# Altium PCB ADC_PCB.PcbDoc (part 2 of 2)
Units mil, origin at the board's own origin, x right, y up, seen from the top; angles counter-clockwise.
Board outline 5600 x 4000 mil, 4 copper layers (Top Layer, Plane(Gnd), Plane(Power), Bottom Layer), stack 23.756 mil thick; 244 components, 233 nets, 649 pads, 177 vias.
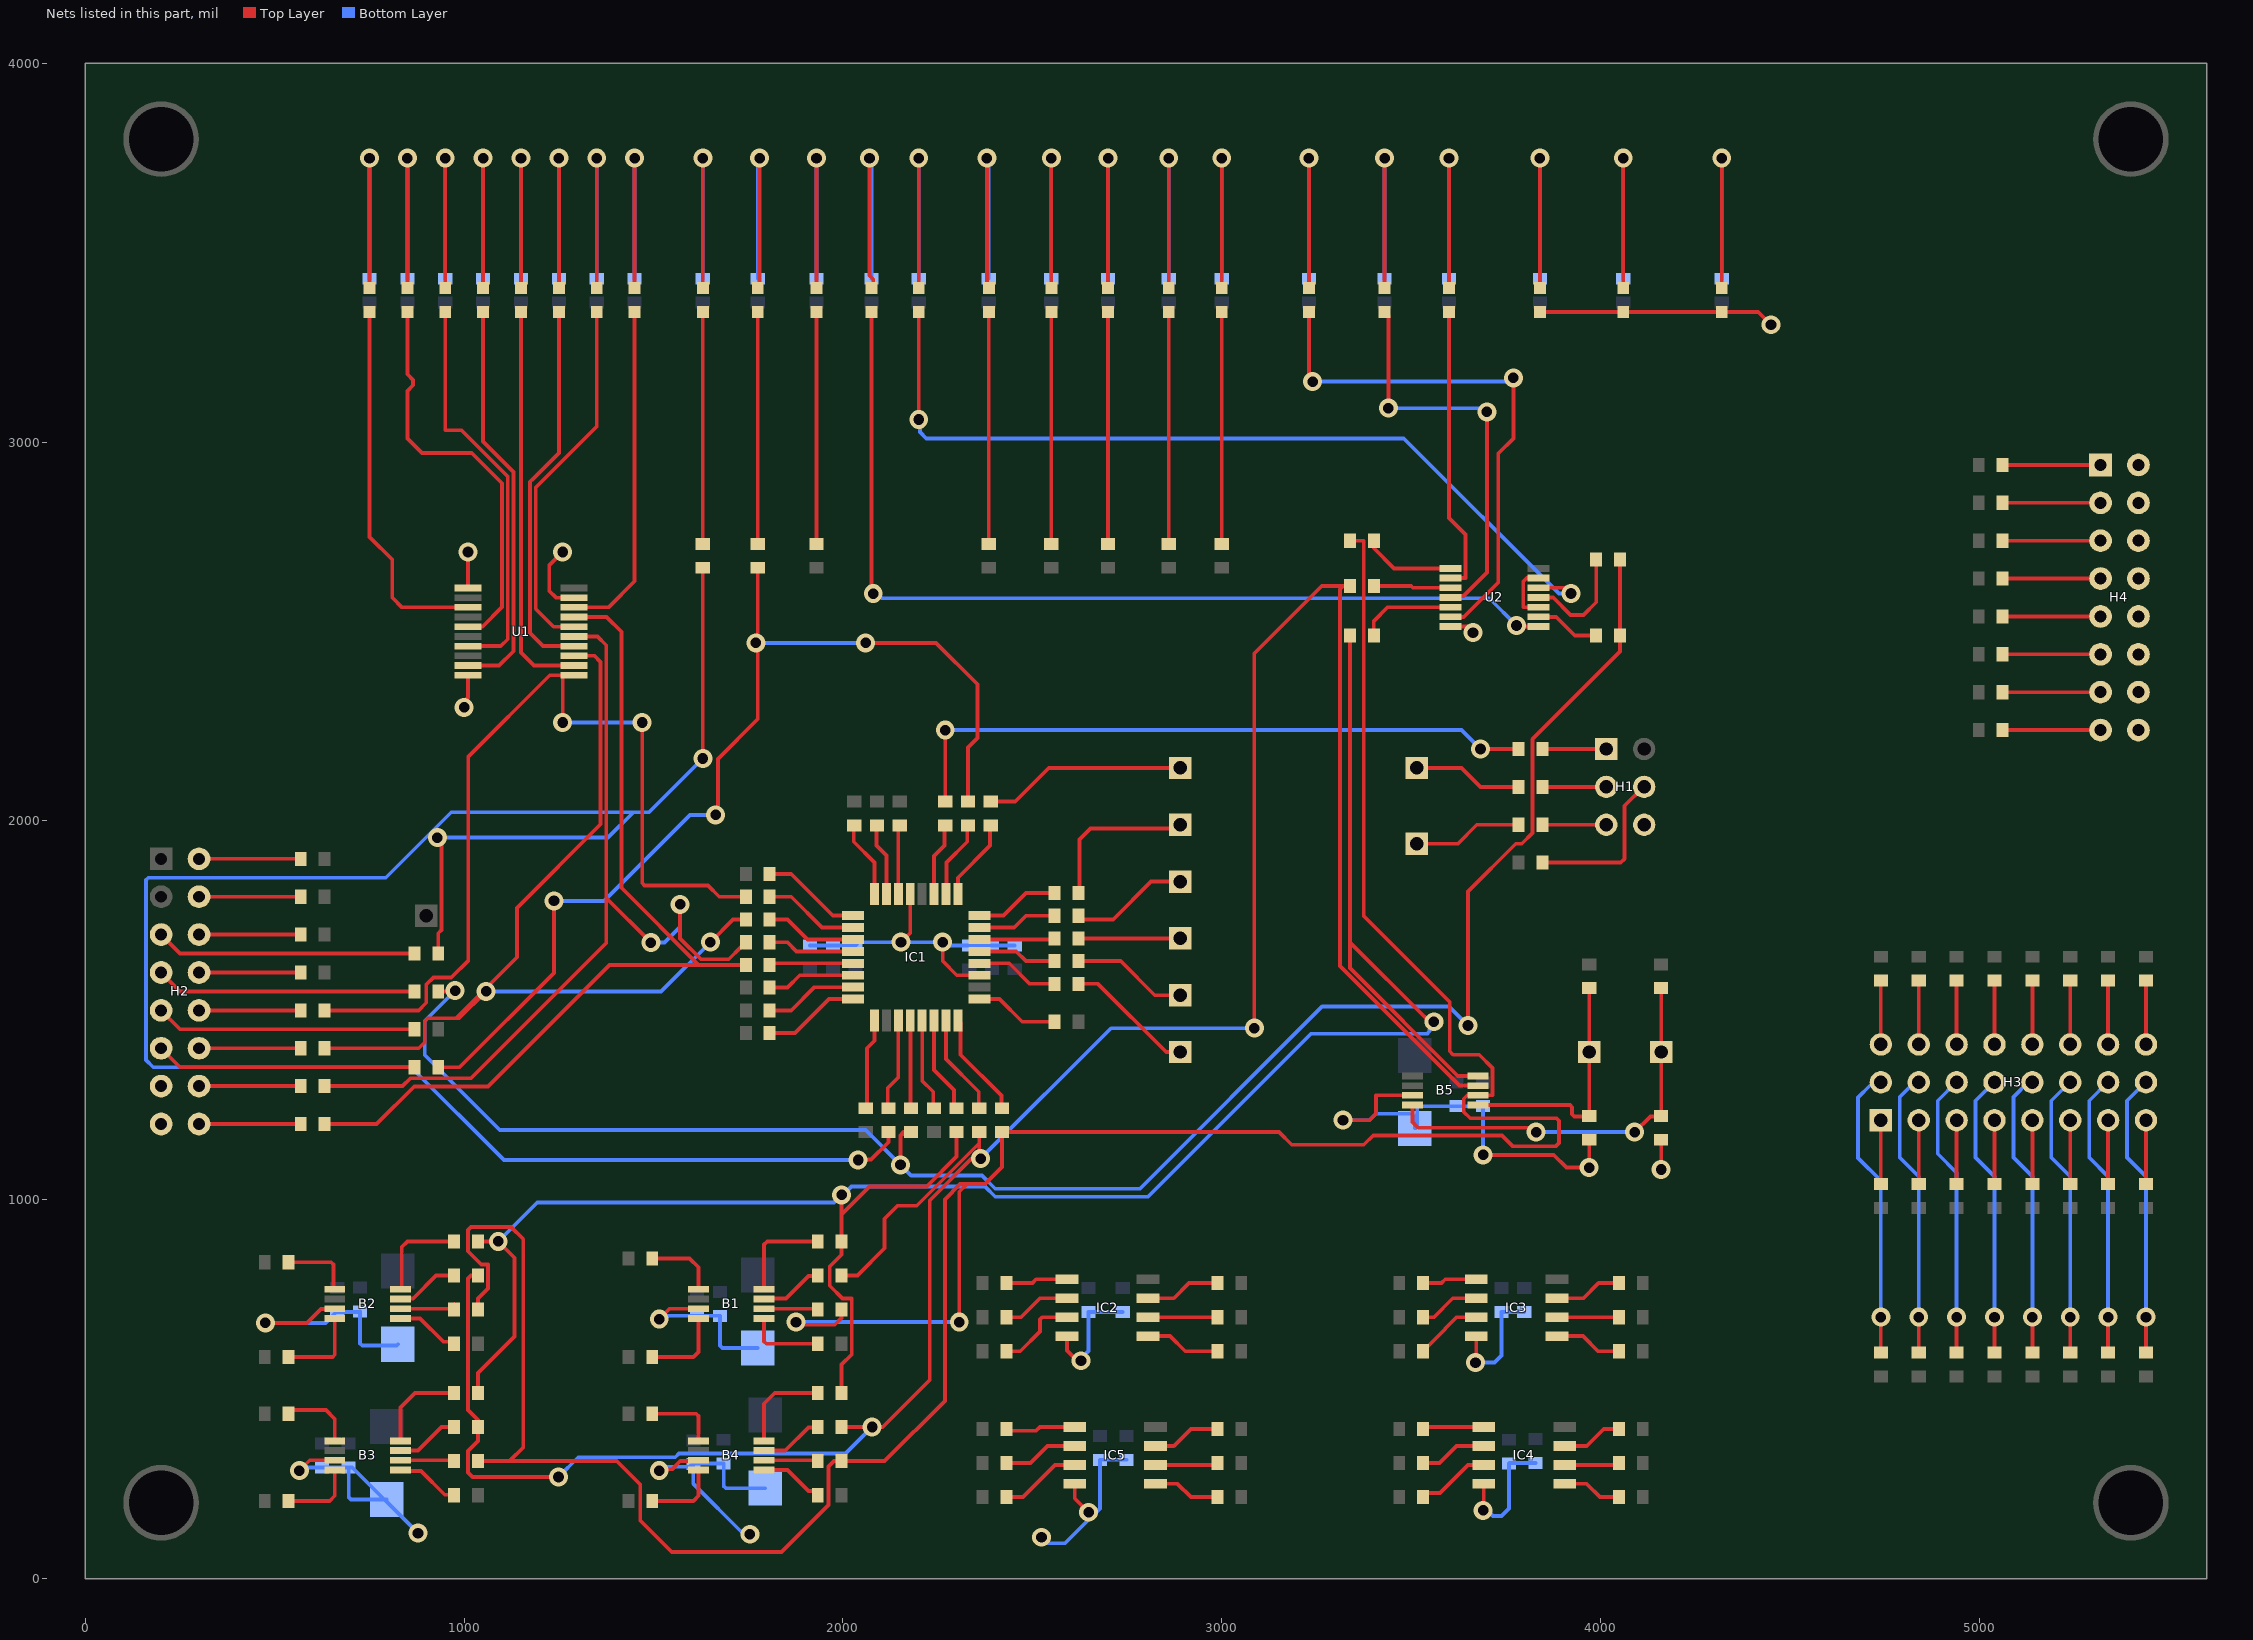
[diagram p4: the nets of this part, all layers, seen from the top]

## Via types
v1: diameter 50, hole 28, Top Layer to Bottom Layer, 177 vias

## Nets (pads, with @x,y where several pads share a name; then routed paths per layer and width w, separated by ;. In a path a pad name is that pad's centre, name@x,y a point inside that pad or via, vN(x,y) a via of type N, cw(c..) or ccw(c..) an arc to the next point about the centre after c; other vN are vias at no path point) (continued)
CPU_D4: R78.1 R84.1 U1.11 | length 2416.5
  Top Layer w10: R84.1@631.5,1500 880,1500 900,1520 900,1568 919.03,1587.03 966.03,1587.03 1011,1632 1011,2169.84 1226,2384.84 U1.11@1263,2384.84 ; v1(1260,2260) 1260,2381.84 U1.11@1263,2384.84 ; U1.11@1289.76,2384.84 U1.11@1263,2384.84 ; v1(1470,2260) 1470,1835.87 1475.87,1830 1643.52,1830 1673.52,1800 R78.1@1743.5,1800
  Bottom Layer w10: v1(1260,2260) v1(1470,2260)
CPU_D5: R82.1 R88.1 U1.13 | length 2461.3
  Top Layer w10: R88.1@631.5,1400 880,1400 896,1416 896,1471 904,1479 977.66,1479 ; v1(1058,1550) 987,1479 977.66,1479 ; U1.13@1289.76,2436.02 1344,2436.02 1360,2420.02 1360,1991.15 1139.11,1770.26 1139.11,1640.45 977.66,1479 ; v1(1650,1680) 1710,1740 R82.1@1743.5,1740
  Bottom Layer w10: v1(1058,1550) 1520,1550 v1(1650,1680)
CPU_D6: R86.1 R92.1 U1.15 | length 2408.4
  Top Layer w10: R92.1@631.5,1300 837,1300 858,1321 1018,1321 1375,1678 1375,1797 ; U1.15@1289.76,2487.2 1351.8,2487.2 1375,2464 1375,1797 ; v1(1493,1679) 1375,1797 ; v1(1570,1780) 1570,1690 1625,1635 1698.5,1635 1729.8,1666.3 1732.76,1666.3 1743.5,1677.05 R86.1@1743.5,1680
  Bottom Layer w10: v1(1493,1679) 1529,1679 1570,1720 v1(1570,1780)
CPU_D7: R90.1 R93.1 U1.17 | length 2391.2
  Top Layer w10: R93.1@631.5,1200 768.85,1200 868,1299.15 1063.15,1299.15 1384,1620 1620,1620 R90.1@1743.5,1620 ; U1.17@1289.76,2538.39 1376,2538.39 1415,2499.39 1415,1823.79 1618.79,1620
CPU_nInt: R60.1 R77.2 R104.2 | length 5556.7
  Top Layer w10: v1(929,1956) 940,1945 940,1712 931.5,1703.5 R77.2@931.5,1650 ; v1(1630,2165) R60.1@1630,2668.5 ; v1(2040,1105) 2041.14,1106.14 2074.14,1106.14 2120,1152 R104.2@2120,1178.5
  Bottom Layer w10: v1(929,1956) 1380,1956 1447,2023 ; v1(1630,2165) 1488,2023 1447,2023 ; v1(2040,1105) 1105,1105 860,1350 179,1350 160,1369 160,1844.14 165.86,1850 793,1850 966,2023 1447,2023
CPU_Reset: R61.1 R69.2 R89.2 | length 2768.4
  Top Layer w10: R89.2@931.5,1350 988,1350 1237,1599 v1(1237,1789) ; v1(1664,2016) 1670,2022 1670,2164 1775,2269 R61.1@1775,2668.5 ; v1(2060,2470) 2246,2470 2355.25,2360.75 2355.25,2218.91 2330,2193.66 R69.2@2330,2051.5
  Bottom Layer w10: v1(1237,1789) 1369,1789 1596,2016 v1(1664,2016) ; v1(1770,2470) v1(2060,2470)
CPU_RnW: R50.1 R51.1 R81.2 R103.2 | length 4913.3
  Top Layer w10: R81.2@931.5,1550 974,1550 v1(976,1552) ; v1(2152,1092) 2152,1170.5 ; v1(3650,1460) 3650,1814 3776,1940 3792,1940 3820,1968 3820,2216 4051.5,2447.5 R50.1@4051.5,2490 R51.1@4051.5,2690 ; 2152,1170.5 R103.2@2180,1178.5 2160,1178.5 2152,1170.5
  Bottom Layer w10: v1(976,1552) 896,1472 896,1382 1094,1184 2060,1184 v1(2152,1092) 2180,1064 2367.21,1064 2402.21,1029 2784.03,1029 3265.03,1510 3600,1510 v1(3650,1460)
DIN: B5.6 R3.1 R5.1 R15.1 R17.1 R47.1 R96.2 | length 8022
  Top Layer w10: R15.1@1036.5,310 1120,310 ; R5.1@1036.5,710 1036.5,739.5 1063,766 1063,829 1045,829 1010,864 1010,920 1018,928 1124,928 1156,896 1156,346 1120,310 ; v1(1876,677) 1883,670 1978.5,670 1996.5,688 R3.1@1996.5,710 ; v1(2307,677) 2307,1021 2327.3,1041.3 ; R47.1@3338.5,2740 3374,2740 3375,2739 3375,1749 3601.68,1522.32 3601.68,1392.22 3610.9,1383 3680,1383 3715,1348 3715,1275.71 B5.6@3676.61,1275.71 3648,1275.71 3639,1266.71 3639,1232 3656,1215 3883.79,1215 3890,1208.79 3890,1150 3881,1141 3769,1141 3740,1170 3400,1170 3375,1145 3185,1145 3151.5,1178.5 R96.2@2420,1178.5 2420,1086.3 2375,1041.3 2327.3,1041.3 ; 1120,310 1403,310 1465,248 1465,153 1548,70 1838,70 1962,194 1962,296 1976,310 R17.1@1996.5,310 2110,310 2269,469 2269,1001 2309.3,1041.3 2327.3,1041.3
  Bottom Layer w10: v1(1876,677) v1(2307,677)
DOUT: B5.7 R7.1 R9.1 R19.1 R21.1 R48.1 R98.2 | length 6932.8
  Top Layer w10: R9.1@1036.5,800 1018,800 1010,792 1010,445 1036.5,418.5 R19.1@1036.5,400 1036.5,363 1010,336.5 1010,280 1022,268 v1(1249,268) ; R21.1@1996.5,400 v1(2077,400) 2105,400 2229,524 2229,998 2339.5,1108.5 v1@2360,1112 ; R7.1@1996.5,800 2038,800 2110,872 2110,950 2144,984 2195,984 2360,1149 ; R98.2@2360,1178.5 2360,1149 ; v1(2363.5,1108.5) v1@2360,1112 ; v1(3086,1453) 3086,2442 3264,2620 3320,2620 ; R48.1@3338.5,2620 3320,2620 ; B5.7@3676.61,1301.3 3627.49,1301.3 3312,1616.79 3312,2612 3320,2620 ; v1@2360,1112 2360,1149
  Bottom Layer w10: v1(1249,268) 1301,320 1557,320 1567,330 2007,330 v1(2077,400) ; v1(2363.5,1108.5) 2708,1453 v1(3086,1453)
GND: B1.3 B2.3 B3.3 B4.3 B5.3 C1.2 C2.2 C3.2 C4.2 C5.2 C6.2 C7.2 C8.2 C9.2 C10.2 C11.2 C12.2 C13.2 C14.2 C15.2 C16.2 C17.2 C18.2 C19.2 C20.2 C21.2 C22.2 C23.2 C24.2 C25.2 C26.2 C27.2 C28.2 C29.2 H1.6 H2.13 H2.15 H4.2 H4.4 H4.6 H4.8 H4.10 H4.12 H4.14 H4.16 IC1.19 IC1.29 IC2.4 IC3.4 IC4.4 IC5.4 LED10.1 LED21.1 LED22.1 R155.1 R156.2 U1.1 U1.10 U1.19 U2.7 | length 7197.8
  Top Layer w10: v1(475,675) 585,675 621.68,711.68 657.87,711.68 B2.3@658.39,712.2 ; v1(565,285) 592.2,312.2 B3.3@658.39,312.2 ; v1(1000,2300) 1007.65,2307.65 1007.65,2323.28 1010.24,2325.86 U1.10@1010.24,2384.84 ; v1(1010,2710) 1010.24,2709.76 U1.1@1010.24,2615.16 ; v1(1260,2710) 1224.33,2674.33 1224.33,2608 1242.76,2589.57 U1.19@1289.76,2589.57 ; v1(1515,285) 1518.28,288.28 1548.28,288.28 1570.47,310.47 1616.65,310.47 B4.3@1618.39,312.2 ; v1(1515,685) 1542.2,712.2 B1.3@1618.39,712.2 ; v1(2153.32,1680) 2177.57,1704.25 IC1.29@2177.57,1806.85 ; v1(2263.32,1680) 2263.32,1630 2300.56,1592.76 IC1.19@2360.17,1592.76 ; IC2.4@2591.77,640 2591.77,601.73 2619.36,574.14 2627.65,574.14 v1(2628.5,575) ; IC5.4@2611.77,250 2611.77,211.73 v1@2655.17,168.33 ; v1(3320,1210) 3390,1210 3407.2,1227.2 3407.2,1275.71 B5.3@3503.39,1275.71 ; U2.7@3604.33,2513.23 3647.37,2513.23 v1(3663.37,2497.23) ; v1(3670,570) 3683.5,570 3688.5,575 3671.77,591.73 IC3.4@3671.77,640 ; v1(3690,180) 3691.77,181.77 IC4.4@3691.77,250 ; v1(3690,1118.5) 3770,1118.5 3876.5,1118.5 3910,1085 v1(3970,1085) 3970,1108.5 R155.1@3970,1157.01 ; LED22.1@3840,3343.5 LED21.1@4060,3343.5 LED10.1@4320,3343.5 4416.5,3343.5 v1(4450,3310) ; v1(4160,1080) 4160,1109.36 R156.2@4160,1157.01
  Bottom Layer w10: v1(475,675) 633.54,675 662.05,703.5 C6.2@665,703.5 723.5,703.5 C5.2@725,705 725,620.86 730.86,615 821.46,615 C2.2@825,618.54 ; v1(565,285) 575.82,285 584.33,293.5 C12.2@625,293.5 C11.2@695,293.5 ; C8.2@795,208.54 701.46,208.54 695,215 C11.2@695,293.5 ; v1(878,120) 704.5,293.5 C11.2@695,293.5 ; v1(1515,285) 1525.82,285 1535.82,295 1595.04,295 1603.54,303.5 C10.2@1685,303.5 1685,244.4 1690.86,238.54 C7.2@1795,238.54 ; v1(1515,685) 1525.82,685 1534.33,693.5 C4.2@1675,693.5 1675,615 1681.46,608.54 C1.2@1775,608.54 ; C9.2@1605,302.01 1605,250 1738,117 v1(1754,117) ; C13.2@1913.32,1671.5 C18.2@1973.32,1671.5 C15.2@2033.32,1671.5 2041.82,1680 v1(2153.32,1680) v1(2263.32,1680) 2274.14,1680 2282.64,1671.5 C16.2@2333.32,1671.5 C14.2@2393.32,1671.5 C17.2@2453.32,1671.5 ; v1(2524,109) 2524,104 2535,93 2586.5,93 2648.5,155 2678.5,185 C26.2@2678.5,313.5 C25.2@2748.5,313.5 ; v1(2628.5,575) 2628.5,580.86 2648.5,600.86 C19.2@2648.5,703.5 C20.2@2738.5,703.5 ; v1(3320,1210) 3390,1210 3407,1227 C27.2@3495.99,1227 ; v1(3670,570) v1@3683.5,570 ; v1@3683.32,1125.19 v1(3690,1118.5) C29.2@3690,1247.01 C28.2@3620,1247.01 3516,1247.01 C27.2@3516,1226 ; v1@3688.5,575 v1@3683.5,570 ; v1(3690,180) 3700.82,180 3715.82,165 3738.5,165 3758.5,185 C23.2@3758.5,303.5 3760,305 C24.2@3828.5,305 ; C21.2@3798.5,703.5 C22.2@3738.5,703.5 3738.5,625 3738.5,588.5 3720,570 3688.5,570 v1@3683.5,570 ; C27.2@3516,1226 3516,1194.5 C27.2@3510,1188.5 3510,1220 C27.2@3516,1226
  other v1: 2648.5,175
NetB1_1: B1.1 R1.2 | length 189.8
  Top Layer w10: R1.2@1496.5,845 1595,845 1618.39,821.61 B1.1@1618.39,763.39
NetB1_4: B1.4 R8.1 | length 215.7
  Top Layer w10: R8.1@1496.5,585 1605,585 1618.39,598.39 B1.4@1618.39,686.61
NetB1_5: B1.5 R4.1 | length 205.1
  Top Layer w10: B1.5@1791.61,686.61 1791.61,625.86 1797.47,620 R4.1@1933.5,620
NetB1_6: B1.6 R3.2 | length 142.8
  Top Layer w10: B1.6@1791.61,712.2 1931.3,712.2 R3.2@1933.5,710
NetB1_7: B1.7 R7.2 | length 167.7
  Top Layer w10: B1.7@1791.61,737.8 1793.35,739.53 1849.53,739.53 1908.61,798.61 1932.12,798.61 R7.2@1933.5,800
NetB1_8: B1.8 R11.2 | length 263.6
  Top Layer w10: B1.8@1791.61,763.39 1791.61,881.61 1800,890 R11.2@1933.5,890
NetB2_1: B2.1 R2.2 | length 196.3
  Top Layer w10: R2.2@536.5,835 649.14,835 655,829.14 655,766.77 B2.1@656.77,765 ; B2.1@658.39,763.39 B2.1@656.77,765 ; B2.1@665,765 B2.1@656.77,765
NetB2_4: B2.4 R10.1 | length 226.3
  Top Layer w10: R10.1@530.26,585 652.53,585 658.39,590.86 B2.4@658.39,686.61
NetB2_5: B2.5 R6.1 | length 172.4
  Top Layer w10: B2.5@831.61,686.61 883.39,686.61 945,625 973,625 973.5,625 R6.1@973.5,620
NetB2_6: B2.6 R5.2 | length 161.3
  Top Layer w10: B2.6@831.61,712.2 962.76,712.2 R5.2@973.5,722.95 ; R5.2@973.5,710 R5.2@973.5,722.95 ; R5.2@973.5,725 R5.2@973.5,722.95
NetB2_7: B2.7 R9.2 | length 167.7
  Top Layer w10: B2.7@831.61,737.8 833.35,739.53 865.39,739.53 925.86,800 R9.2@973.5,800
NetB2_8: B2.8 R12.2 | length 257.7
  Top Layer w10: B2.8@831.61,763.39 835,766.77 835,875 850,890 R12.2@973.5,890
NetB3_1: B3.1 R13.2 | length 193.9
  Top Layer w10: R13.2@536.5,435 546.5,445 635,445 658.39,421.61 B3.1@658.39,363.39
NetB3_4: B3.4 R20.1 | length 195.7
  Top Layer w10: R20.1@536.5,205 645,205 658.39,218.39 B3.4@658.39,286.61
NetB3_5: B3.5 R16.1 | length 169.5
  Top Layer w10: B3.5@831.61,286.61 834.54,283.68 886.32,283.68 948.61,221.39 972.12,221.39 R16.1@973.5,220
NetB3_6: B3.6 R15.2 | length 142.8
  Top Layer w10: B3.6@831.61,312.2 971.3,312.2 R15.2@973.5,310
NetB3_7: B3.7 R19.2 | length 167.7
  Top Layer w10: B3.7@831.61,337.8 877.8,337.8 940,400 R19.2@973.5,400
NetB3_8: B3.8 R23.2 | length 246
  Top Layer w10: B3.8@831.61,363.39 831.61,451.61 870,490 R23.2@973.5,490
NetB4_1: B4.1 R14.2 | length 190.1
  Top Layer w10: R14.2@1496.5,435 1612.53,435 1618.39,429.14 B4.1@1618.39,363.39
NetB4_4: B4.4 R22.1 | length 195.7
  Top Layer w10: R22.1@1496.5,205 1605,205 1618.39,218.39 B4.4@1618.39,286.61
NetB4_5: B4.5 R18.1 | length 169.7
  Top Layer w10: B4.5@1791.61,286.61 1853.39,286.61 1908.92,231.08 1922.76,231.08 1933.5,220.33 R18.1@1933.5,220
NetB4_6: B4.6 R17.2 | length 142.8
  Top Layer w10: B4.6@1791.61,312.2 1931.3,312.2 R17.2@1933.5,310
NetB4_7: B4.7 R21.2 | length 167.7
  Top Layer w10: B4.7@1791.61,337.8 1847.8,337.8 1908.61,398.61 1932.12,398.61 R21.2@1933.5,400
NetB4_8: B4.8 R24.2 | length 251.9
  Top Layer w10: B4.8@1791.61,363.39 1791.61,461.61 1820,490 R24.2@1933.5,490
NetB5_4: B5.4 R154.1 R156.1 TP11.1 | length 1068.3
  Top Layer w10: B5.4@3503.39,1250.12 3503.39,1205.12 3518.5,1190 3807.68,1190 3819.18,1178.5 v1(3830,1178.5) ; v1(4090,1178.5) 4131.5,1220 4160,1220 4160,1547.01 R154.1@4160,1558.5
  Bottom Layer w10: v1(3830,1178.5) v1(4090,1178.5)
NetB5_5: B5.5 R153.2 R155.2 TP10.1 | length 655.1
  Top Layer w10: B5.5@3676.61,1250.12 3848.39,1250.12 3919.14,1250.12 3925,1244.26 3925,1225.86 3930.86,1220 3970,1220 3970,1388.5 3970,1557.01 R153.2@3970,1558.5
NetH1_1: H1.1 R62.2 | length 170.2
  Top Layer w10: R62.2@3844.81,2190 4013.32,2190 H1.1@4015,2190
NetH1_3: H1.3 R63.2 | length 170.2
  Top Layer w10: R63.2@3844.81,2090 4013.32,2090 H1.3@4015,2090
NetH1_4: H1.4 R64.1 | length 435
  Top Layer w10: R64.1@3844.81,1890 4053.32,1890 4063.32,1900 4063.32,2040 4113.32,2090 H1.4@4115,2090
NetH1_5: H1.5 R65.2 | length 170.2
  Top Layer w10: R65.2@3844.81,1990 4013.32,1990 H1.5@4015,1990
NetH2_2: H2.2 R70.2 | length 268.5
  Top Layer w10: H2.2@300,1900 R70.2@568.5,1900
NetH2_4: H2.4 R73.2 | length 268.5
  Top Layer w10: H2.4@300,1800 R73.2@568.5,1800
NetH2_5: H2.5 R77.1 | length 689.2
  Top Layer w10: H2.5@200,1700 250,1650 R77.1@868.5,1650
NetH2_6: H2.6 R76.2 | length 268.5
  Top Layer w10: H2.6@300,1700 R76.2@568.5,1700
NetH2_7: H2.7 R81.1 | length 689.2
  Top Layer w10: H2.7@200,1600 250,1550 R81.1@868.5,1550
NetH2_8: H2.8 R80.2 | length 268.5
  Top Layer w10: H2.8@300,1600 R80.2@568.5,1600
NetH2_9: H2.9 R85.1 | length 689.2
  Top Layer w10: H2.9@200,1500 250,1450 R85.1@868.5,1450
NetH2_10: H2.10 R84.2 | length 268.5
  Top Layer w10: H2.10@300,1500 R84.2@568.5,1500
NetH2_11: H2.11 R89.1 | length 689.2
  Top Layer w10: H2.11@200,1400 250,1350 R89.1@868.5,1350
NetH2_12: H2.12 R88.2 | length 268.5
  Top Layer w10: H2.12@300,1400 R88.2@568.5,1400
NetH2_14: H2.14 R92.2 | length 268.5
  Top Layer w10: H2.14@300,1300 R92.2@568.5,1300
NetH2_16: H2.16 R93.2 | length 268.5
  Top Layer w10: H2.16@300,1200 R93.2@568.5,1200
NetH3_1: H3.1 R105.2 | length 170
  Top Layer w10: R105.2@4740,1041.5 4740,1042.99 H3.1@4740,1211.5
NetH3_2: H3.2 R107.2 | length 777
  Top Layer w10: R107.2@4740,596.5 v1(4740,690)
  Bottom Layer w10: v1(4740,690) 4740,1050 4680,1110 4680,1270 4712.11,1302.11 4730.61,1302.11 4740,1311.5 H3.2@4740,1310
NetH3_3: H3.3 R109.2 | length 170
  Top Layer w10: H3.3@4740,1410 4740,1411.5 R109.2@4740,1580
NetH3_4: H3.4 R111.2 | length 170
  Top Layer w10: R111.2@4840,1041.5 4840,1042.99 H3.4@4840,1211.5
NetH3_5: H3.5 R113.2 | length 784.9
  Top Layer w10: R113.2@4840,596.5 4830,596.5 4830,592.99 4840,602.99 v1(4840,690)
  Bottom Layer w10: v1(4840,690) 4840,1061.5 4790,1111.5 4790,1271.5 4830,1311.5 4840,1311.5 H3.5@4840,1310
NetH3_6: H3.6 R115.2 | length 170
  Top Layer w10: H3.6@4840,1410 4840,1411.5 R115.2@4840,1580
NetH3_7: H3.7 R117.2 | length 170
  Top Layer w10: R117.2@4940,1041.5 4940,1042.99 H3.7@4940,1211.5
NetH3_8: H3.8 R119.2 | length 772.1
  Top Layer w10: R119.2@4930,592.99 R119.2@4940,602.99 ; R119.2@4940,596.5 R119.2@4940,602.99 ; v1(4940,690) R119.2@4940,602.99
  Bottom Layer w10: v1(4940,690) 4940,1071.5 4890,1121.5 4890,1261.5 4940,1311.5 H3.8@4940,1310
NetH3_9: H3.9 R121.2 | length 170
  Top Layer w10: H3.9@4940,1410 4940,1411.5 R121.2@4940,1580
NetH3_10: H3.10 R123.2 | length 170
  Top Layer w10: R123.2@5040,1041.5 5040,1042.99 H3.10@5040,1211.5
NetH3_11: H3.11 R125.2 | length 779.1
  Top Layer w10: R125.2@5040,596.5 5030,596.5 5030,592.99 5040,602.99 v1(5040,690)
  Bottom Layer w10: v1(5040,690) 5040,1061.5 4990,1111.5 4990,1261.5 5040,1311.5 H3.11@5040,1310
NetH3_12: H3.12 R127.2 | length 170
  Top Layer w10: H3.12@5040,1410 5040,1411.5 R127.2@5040,1580
NetH3_13: H3.13 R128.1 | length 170
  Top Layer w10: R128.1@5140,1041.5 5140,1042.99 H3.13@5140,1211.5
NetH3_14: H3.14 R126.1 | length 763.8
  Top Layer w10: R126.1@5140,596.5 v1(5140,690)
  Bottom Layer w10: v1(5140,690) 5140,1061.5 5090,1111.5 5090,1271.5 5130,1311.5 5140,1311.5 H3.14@5140,1310
NetH3_15: H3.15 R124.1 | length 170
  Top Layer w10: H3.15@5140,1410 5140,1411.5 R124.1@5140,1580
NetH3_16: H3.16 R122.1 | length 170
  Top Layer w10: R122.1@5240,1041.5 5240,1042.99 H3.16@5240,1211.5
NetH3_17: H3.17 R120.1 | length 757.9
  Top Layer w10: R120.1@5240,596.5 v1(5240,690)
  Bottom Layer w10: v1(5240,690) 5240,1061.5 5190,1111.5 5190,1261.5 5240,1311.5 H3.17@5240,1310
NetH3_18: H3.18 R118.1 | length 170
  Top Layer w10: H3.18@5240,1410 5240,1411.5 R118.1@5240,1580
NetH3_19: H3.19 R116.1 | length 170
  Top Layer w10: R116.1@5340,1041.5 5340,1042.99 H3.19@5340,1211.5
NetH3_20: H3.20 R114.1 | length 758.9
  Top Layer w10: R114.1@5340,596.5 v1(5340,690)
  Bottom Layer w10: v1@5337.65,690 5340,692.35 5340,1061.5 5290,1111.5 5290,1261.5 5340,1311.5 H3.20@5340,1310
NetH3_21: H3.21 R112.1 | length 170
  Top Layer w10: H3.21@5340,1410 5340,1411.5 R112.1@5340,1580
NetH3_22: H3.22 R110.1 | length 170
  Top Layer w10: R110.1@5440,1041.5 5440,1042.99 H3.22@5440,1211.5
NetH3_23: H3.23 R108.1 | length 767.9
  Top Layer w10: R108.1@5440,596.5 v1(5440,690)
  Bottom Layer w10: v1@5440,680 v1(5440,690) 5440,1061.5 5390,1111.5 5390,1261.5 5440,1311.5 H3.23@5440,1310
NetH3_24: H3.24 R106.1 | length 170
  Top Layer w10: H3.24@5440,1410 5440,1411.5 R106.1@5440,1580
NetH4_1: H4.1 R157.2 | length 260
  Top Layer w10: R157.2@5061.5,2940 5062.99,2940 H4.1@5321.5,2940
NetH4_3: H4.3 R158.2 | length 260
  Top Layer w10: R158.2@5061.5,2840 5062.99,2840 H4.3@5321.5,2840
NetH4_5: H4.5 R159.2 | length 260
  Top Layer w10: R159.2@5061.5,2740 5062.99,2740 H4.5@5321.5,2740
NetH4_7: H4.7 R160.2 | length 260
  Top Layer w10: R160.2@5061.5,2640 5062.99,2640 H4.7@5321.5,2640
NetH4_9: H4.9 R161.2 | length 260
  Top Layer w10: R161.2@5061.5,2540 5062.99,2540 H4.9@5321.5,2540
NetH4_11: H4.11 R162.2 | length 260
  Top Layer w10: R162.2@5061.5,2440 5062.99,2440 H4.11@5321.5,2440
NetH4_13: H4.13 R163.2 | length 260
  Top Layer w10: R163.2@5061.5,2340 5062.99,2340 H4.13@5321.5,2340
NetH4_15: H4.15 R164.2 | length 260
  Top Layer w10: R164.2@5061.5,2240 5062.99,2240 H4.15@5321.5,2240
NetIC1_1: IC1.1 R74.2 | length 267.1
  Top Layer w10: R74.2@1804.81,1860 1863.32,1860 1973.08,1750.24 IC1.1@2026.47,1750.24
NetIC1_2: IC1.2 R78.2 | length 256.8
  Top Layer w10: R78.2@1803.32,1800 1863.32,1800 1944.58,1718.74 IC1.2@2026.47,1718.74
NetIC1_3: IC1.3 R82.2 | length 243.5
  Top Layer w10: R82.2@1804.81,1740 1853.32,1740 1906.07,1687.24 IC1.3@2026.47,1687.24
NetIC1_4: IC1.4 R86.2 | length 231.7
  Top Layer w10: R86.2@1804.81,1680 1853.32,1680 1877.57,1655.75 IC1.4@2026.47,1655.75
NetIC1_5: IC1.5 R90.2 | length 225.1
  Top Layer w10: R90.2@1806.5,1620 1804.81,1620 1809.06,1624.25 IC1.5@2026.47,1624.25
NetIC1_6: IC1.6 R95.2 | length 235.2
  Top Layer w10: R95.2@1804.81,1560 1853.32,1560 1886.07,1592.76 IC1.6@2026.47,1592.76
NetIC1_7: IC1.7 R97.2 | length 253.2
  Top Layer w10: R97.2@1798.66,1500 1863.32,1500 1924.58,1561.26 IC1.7@2026.47,1561.26
NetIC1_8: IC1.8 R99.2 | length 260.3
  Top Layer w10: R99.2@1803.32,1440 1873.32,1440 1963.08,1529.76 IC1.8@2026.47,1529.76
NetIC1_9: IC1.9 R101.2 | length 243.6
  Top Layer w10: R101.2@2060,1241.5 2058.32,1241.5 2063.32,1246.5 2063.32,1400 2083.08,1419.76 IC1.9@2083.08,1473.15
NetIC1_11: IC1.11 R104.1 | length 244.8
  Top Layer w10: R104.1@2120,1241.5 2118.32,1241.5 2118.32,1295 2146.07,1322.76 IC1.11@2146.07,1473.15
NetIC1_12: IC1.12 R103.1 | length 238.6
  Top Layer w10: IC1.12@2173.32,1468.9 IC1.12@2177.57,1473.15 ; IC1.12@2175.82,1471.4 2178.32,1468.9 2178.32,1241.5 R103.1@2180,1241.5
NetIC1_13: IC1.13 R102.1 | length 245.5
  Top Layer w10: IC1.13@2209.06,1473.15 2209.06,1314.25 2238.32,1285 2238.32,1241.5 R102.1@2240,1241.5
NetIC1_14: IC1.14 R100.1 | length 257.3
  Top Layer w10: IC1.14@2240.56,1473.15 2240.56,1342.76 2293.32,1290 2293.32,1246.5 2298.32,1241.5 R100.1@2300,1241.5
NetIC1_15: IC1.15 R98.1 | length 269.1
  Top Layer w10: IC1.15@2272.06,1473.15 2272.06,1371.26 2358.32,1285 2358.32,1241.5 R98.1@2360,1241.5
NetIC1_16: IC1.16 R96.1 | length 280.9
  Top Layer w10: IC1.16@2303.55,1473.15 2310.36,1466.34 2310.36,1382.95 2418.32,1275 2418.32,1241.5 R96.1@2420,1241.5
NetIC1_17: IC1.17 R94.1 | length 223.1
  Top Layer w10: IC1.17@2360.17,1529.76 2413.55,1529.76 2473.32,1470 2551.82,1470 R94.1@2558.5,1470
NetIC1_20: IC1.20 R91.1 | length 220.8
  Top Layer w10: IC1.20@2360.17,1624.25 2439.06,1624.25 2493.32,1570 2551.82,1570 R91.1@2558.5,1570
NetIC1_21: IC1.21 R87.1 | length 209
  Top Layer w10: IC1.21@2360.17,1655.75 2457.57,1655.75 2483.32,1630 2551.82,1630 R87.1@2558.5,1630
NetIC1_22: IC1.22 R83.1 | length 199.5
  Top Layer w10: IC1.22@2360.17,1687.24 2549.06,1687.24 2551.82,1690 R83.1@2558.5,1690
NetIC1_23: IC1.23 R79.1 | length 211.3
  Top Layer w10: IC1.23@2360.17,1718.74 2452.06,1718.74 2483.32,1750 2551.82,1750 R79.1@2558.5,1750
NetIC1_24: IC1.24 R75.1 | length 223.1
  Top Layer w10: IC1.24@2360.17,1750.24 2423.55,1750.24 2483.32,1810 2551.82,1810 R75.1@2558.5,1810
NetIC1_25: IC1.25 R72.1 | length 218.4
  Top Layer w10: IC1.25@2303.55,1806.85 2303.55,1850.24 2388.32,1935 2388.32,1988.5 R72.1@2390,1988.5
NetIC1_26: IC1.26 R69.1 | length 206.6
  Top Layer w10: IC1.26@2272.06,1806.85 2273.32,1808.11 2273.32,1890 2328.32,1945 2328.32,1988.5 R69.1@2330,1988.5
NetIC1_27: IC1.27 R67.1 | length 194.8
  Top Layer w10: IC1.27@2240.56,1806.85 2240.56,1907.24 2268.32,1935 2268.32,1988.5 R67.1@2270,1988.5
NetIC1_30: IC1.30 R66.2 | length 189.5
  Top Layer w10: IC1.30@2146.07,1806.85 2146.07,1985.75 2143.32,1988.5 R66.2@2150,1988.5
NetIC1_31: IC1.31 R68.2 | length 194.2
  Top Layer w10: R68.2@2090,1988.5 2088.32,1988.5 2088.32,1935 2114.58,1908.74 IC1.31@2114.58,1806.85
NetIC1_32: IC1.32 R71.2 | length 206.2
  Top Layer w10: R71.2@2030,1988.5 2028.32,1988.5 2028.32,1945 2083.32,1890 2083.32,1807.09 IC1.32@2083.08,1806.85
NetIC2_1: IC2.1 R131.2 | length 164.4
  Top Layer w10: R131.2@2431.5,780 2500,780 2510,790 2533.5,790 IC2.1@2591.77,790
NetIC2_2: IC2.2 R133.1 | length 181
  Top Layer w10: R133.1@2431.5,690 2470,690 2520,740 IC2.2@2591.77,740
NetIC2_3: IC2.3 R129.1 | length 216.5
  Top Layer w10: R129.1@2431.5,600 2468.13,600 2520,651.87 2520,684.14 2525.86,690 IC2.3@2591.77,690
NetIC2_5: IC2.5 R135.1 | length 199.8
  Top Layer w10: IC2.5@2805.24,640 2863.5,640 2903.5,600 R135.1@2988.5,600
NetIC2_6: IC2.6 R139.1 | length 183.3
  Top Layer w10: IC2.6@2805.24,690 R139.1@2988.5,690
NetIC2_7: IC2.7 R137.2 | length 199.8
  Top Layer w10: IC2.7@2805.24,740 2873.5,740 2913.5,780 R137.2@2988.5,780
NetIC3_1: IC3.1 R132.2 | length 144.4
  Top Layer w10: R132.2@3531.5,780 3580,780 3590,790 IC3.1@3671.77,790
NetIC3_2: IC3.2 R134.1 | length 161
  Top Layer w10: R134.1@3531.5,690 3560,690 3610,740 IC3.2@3671.77,740
NetIC3_3: IC3.3 R130.1 | length 180.2
  Top Layer w10: R130.1@3531.5,600 3531.5,602.95 3542.24,613.7 3545.2,613.7 3590,658.5 3590,660 3620,690 IC3.3@3671.77,690
NetIC3_5: IC3.5 R136.1 | length 179.8
  Top Layer w10: IC3.5@3885.24,640 3953.5,640 3993.5,600 4047.01,600 R136.1@4048.5,600
NetIC3_6: IC3.6 R140.1 | length 163.3
  Top Layer w10: IC3.6@3885.24,690 4047.01,690 R140.1@4048.5,690
NetIC3_7: IC3.7 R138.2 | length 179.8
  Top Layer w10: IC3.7@3885.24,740 3955,740 3995,780 4003.5,780 4047.01,780 R138.2@4048.5,780
NetIC4_1: IC4.1 R142.2 | length 162.3
  Top Layer w10: R142.2@3531.5,395 3536.5,400 IC4.1@3691.77,400
NetIC4_2: IC4.2 R143.1 | length 178.9
  Top Layer w10: R143.1@3531.5,305 3575,305 3620,350 IC4.2@3691.77,350
NetIC4_3: IC4.3 R141.1 | length 195.7
  Top Layer w10: R141.1@3531.5,215 3531.5,215.33 3542.24,226.08 3576.08,226.08 3650,300 IC4.3@3691.77,300
NetIC4_5: IC4.5 R144.1 | length 157.8
  Top Layer w10: IC4.5@3905.24,250 3963.5,250 3998.5,215 R144.1@4048.5,215
NetIC4_6: IC4.6 R147.1 | length 145.3
  Top Layer w10: IC4.6@3905.24,300 4043.5,300 R147.1@4048.5,305
NetIC4_7: IC4.7 R145.2 | length 161.9
  Top Layer w10: IC4.7@3905.24,350 3963.5,350 4008.5,395 R145.2@4048.5,395
NetIC5_1: IC5.1 R148.2 | length 186.5
  Top Layer w10: R148.2@2431.5,395 2436.5,390 2510,390 2520,400 IC5.1@2611.77,400
NetIC5_2: IC5.2 R149.1 | length 198.9
  Top Layer w10: R149.1@2431.5,305 2495,305 2540,350 IC5.2@2611.77,350
NetIC5_3: IC5.3 R146.1 | length 215.5
  Top Layer w10: R146.1@2431.5,215 2475,215 2560,300 IC5.3@2611.77,300
NetIC5_5: IC5.5 R150.1 | length 177.8
  Top Layer w10: IC5.5@2825.24,250 2883.5,250 2918.5,215 2987.01,215 R150.1@2988.5,215
NetIC5_6: IC5.6 R152.1 | length 165.3
  Top Layer w10: IC5.6@2825.24,300 2982.01,300 2987.01,305 R152.1@2988.5,305
NetIC5_7: IC5.7 R151.2 | length 181.9
  Top Layer w10: IC5.7@2825.24,350 2873.5,350 2918.5,395 2987.01,395 R151.2@2988.5,395
NetLED1_1: LED1.1 U2.2 | length 759.3
  Top Layer w10: LED1.1@3600,3343.5 3600,2800 3643.37,2756.63 3643.37,2641.18 U2.2@3604.33,2641.18
NetLED1_2: LED1.2 R25.1 | length 662
  Top Layer w10: LED1.2@3600,3406.5 v1(3600,3750)
  Bottom Layer w10: R25.1@3600,3431.5 3600,3740 v1(3600,3750)
NetLED2_1: LED2.1 U2.4 | length 1068.8
  Top Layer w10: LED2.1@3430,3343.5 3440,3333.5 v1(3440,3090) ; U2.4@3604.33,2590 3608.19,2593.86 3637.86,2593.86 3700,2656 v1(3700,3080)
  Bottom Layer w10: v1(3440,3090) 3440.37,3089.63 3679.54,3089.63 3689.18,3080 v1(3700,3080)
NetLED2_2: LED2.2 R26.1 | length 662
  Top Layer w10: LED2.2@3430,3406.5 v1(3430,3750)
  Bottom Layer w10: R26.1@3430,3431.5 v1(3430,3750)
NetLED3_1: LED3.1 U2.6 | length 1441.9
  Top Layer w10: LED3.1@3230,3343.5 3230,3180.82 3240,3170.82 v1(3240,3160) ; U2.6@3604.33,2538.82 3639,2538.82 3730,2629.82 3730,2970 3770,3010 v1(3770,3170)
  Bottom Layer w10: v1(3240,3160) 3749.18,3160 3759.18,3170 v1(3770,3170)
NetLED3_2: LED3.2 R27.1 | length 662
  Top Layer w10: LED3.2@3230,3406.5 v1(3230,3750)
  Bottom Layer w10: R27.1@3230,3431.5 v1(3230,3750)
NetLED4_1: LED4.1 R52.2 | length 612
  Top Layer w10: R52.2@1930,2731.5 LED4.1@1930,3343.5
NetLED4_2: LED4.2 R30.1 | length 662
  Top Layer w10: LED4.2@1930,3406.5 v1(1930,3750)
  Bottom Layer w10: R30.1@1930,3431.5 v1(1930,3750)
NetLED5_1: LED5.1 R53.2 | length 640.5
  Top Layer w10: R53.2@3000,2731.5 3000,3088.5 ; 3000,3060 3000,3088.5 ; LED5.1@3000,3343.5 3000,3088.5
NetLED5_2: LED5.2 R31.1 | length 662
  Top Layer w10: LED5.2@3000,3406.5 v1(3000,3750)
  Bottom Layer w10: R31.1@3000,3431.5 v1(3000,3750)
NetLED6_1: LED6.1 R54.2 | length 612
  Top Layer w10: R54.2@2860,2731.5 LED6.1@2860,3343.5
NetLED6_2: LED6.2 R32.1 | length 662
  Top Layer w10: LED6.2@2860,3406.5 v1(2860,3750)
  Bottom Layer w10: R32.1@2860,3431.5 v1(2860,3750)
NetLED7_1: LED7.1 R55.2 | length 612
  Top Layer w10: R55.2@2700,2731.5 LED7.1@2700,3343.5
NetLED7_2: LED7.2 R33.1 | length 662
  Top Layer w10: LED7.2@2700,3406.5 v1(2700,3750)
  Bottom Layer w10: R33.1@2700,3431.5 v1(2700,3750)
NetLED8_1: LED8.1 R56.2 | length 612
  Top Layer w10: R56.2@2550,2731.5 LED8.1@2550,3343.5
NetLED8_2: LED8.2 R34.1 | length 662
  Top Layer w10: LED8.2@2550,3406.5 v1(2550,3750)
  Bottom Layer w10: R34.1@2550,3431.5 v1(2550,3750)
NetLED9_1: LED9.1 R57.2 | length 620.8
  Top Layer w10: LED9.1@2385,3343.5 R57.2@2385,2731.5 R57.2@2391.21,2737.71
NetLED9_2: LED9.2 R35.1 | length 666.1
  Top Layer w10: v1(2380,3750) 2380,3411.5 LED9.2@2385,3406.5
  Bottom Layer w10: v1(2380,3750) 2385,3745 R35.1@2385,3431.5
NetLED10_2: LED10.2 R38.1 | length 662
  Top Layer w10: LED10.2@4320,3406.5 v1(4320,3750)
  Bottom Layer w10: R38.1@4320,3431.5 v1(4320,3750)
NetLED11_1: LED11.1 U1.18 | length 899.3
  Top Layer w10: U1.18@1289.76,2563.98 1381,2563.98 1450,2632.98 1450,3011.5 1450,3090 LED11.1@1450,3343.5
NetLED11_2: LED11.2 R39.1 | length 662
  Top Layer w10: LED11.2@1450,3406.5 v1(1450,3750)
  Bottom Layer w10: R39.1@1450,3431.5 v1(1450,3750)
NetLED12_1: LED12.1 U1.16 | length 970.5
  Top Layer w10: U1.16@1289.76,2512.8 1236.2,2512.8 1189,2560 1189,2880.5 1350,3041.5 1350,3090 LED12.1@1350,3343.5
NetLED12_2: LED12.2 R40.1 | length 662
  Top Layer w10: LED12.2@1350,3406.5 v1(1350,3750)
  Bottom Layer w10: R40.1@1350,3431.5 v1(1350,3750)
NetLED13_1: LED13.1 U1.14 | length 1009
  Top Layer w10: LED13.1@1250,3343.5 1250,3090 1250,2971.5 1180,2901.5 1174,2895.5 1174,2496 1208.39,2461.61 U1.14@1289.76,2461.61
NetLED13_2: LED13.2 R41.1 | length 662
  Top Layer w10: LED13.2@1250,3406.5 v1(1250,3750)
  Bottom Layer w10: R41.1@1250,3431.5 v1(1250,3750)
NetLED14_1: LED14.1 U1.12 | length 1052.9
  Top Layer w10: LED14.1@1150,3343.5 1150,3090 1150,3018.28 1150,2444.43 1184,2410.43 U1.12@1289.76,2410.43
NetLED14_2: LED14.2 R42.1 | length 662
  Top Layer w10: LED14.2@1150,3406.5 v1(1150,3750)
  Bottom Layer w10: R42.1@1150,3431.5 v1(1150,3750)
NetLED15_1: LED15.1 U1.9 | length 1063.9
  Top Layer w10: U1.9@1010.24,2410.43 1092.29,2410.43 1130,2448.15 1130,2921.5 1050,3001.5 1050,3041.5 1050,3090 LED15.1@1050,3343.5
NetLED15_2: LED15.2 R43.1 | length 662
  Top Layer w10: LED15.2@1050,3406.5 v1(1050,3750)
  Bottom Layer w10: R43.1@1050,3431.5 v1(1050,3750)
NetLED16_1: LED16.1 U1.7 | length 1069.6
  Top Layer w10: LED16.1@950,3343.5 950,3090 950,3031.5 993.3,3031.5 1115,2909.8 1115,2479.94 1096.67,2461.61 U1.7@1010.24,2461.61
NetLED16_2: LED16.2 R44.1 | length 662
  Top Layer w10: LED16.2@950,3406.5 v1(950,3750)
  Bottom Layer w10: R44.1@950,3431.5 v1(950,3750)
NetLED17_1: LED17.1 U1.5 | length 1083
  Top Layer w10: LED17.1@850,3343.5 850,3179.21 865,3164.21 865,3150.28 850,3135.28 850,3095 850,3031.5 850,3010 888.5,2971.5 900,2971.5 1020,2971.5 1100,2891.5 1100,2564.8 1048,2512.8 U1.5@1010.24,2512.8
NetLED17_2: LED17.2 R45.1 | length 662
  Top Layer w10: LED17.2@850,3406.5 v1(850,3750)
  Bottom Layer w10: R45.1@850,3431.5 v1(850,3750)
NetLED18_1: LED18.1 U1.3 | length 989.4
  Top Layer w10: LED18.1@750,3343.5 750,3095 750,3011.5 750,2750 810,2690 810,2590 836.02,2563.98 U1.3@1010.24,2563.98
NetLED18_2: LED18.2 R46.1 | length 662
  Top Layer w10: LED18.2@750,3406.5 v1(750,3750)
  Bottom Layer w10: R46.1@750,3431.5 v1(750,3750)
NetLED19_1: LED19.1 U2.8 | length 2537.2
  Top Layer w10: LED19.1@2075,3343.5 2075,2605 v1(2080,2600) ; v1(3778,2516) 3780.77,2513.23 U2.8@3835.67,2513.23
  Bottom Layer w10: v1(2080,2600) 2090.82,2600 2102.82,2588 3706,2588 v1(3778,2516)
NetLED19_2: LED19.2 R28.1 | length 670.3
  Top Layer w10: v1(2070,3750) 2070,3440 2080,3430 2080,3411.5 LED19.2@2075,3406.5
  Bottom Layer w10: v1(2070,3750) 2075,3745 R28.1@2075,3431.5
NetLED20_1: LED20.1 U2.12 | length 2305.9
  Top Layer w10: v1(2200,3060) LED20.1@2200,3343.5 ; U2.12@3835.67,2615.59 3907,2615.59 v1(3922,2600.59)
  Bottom Layer w10: v1(2200,3060) 2203.28,3056.72 2203.28,3026.72 2220,3010 3480.59,3010 3890,2600.59 v1(3922,2600.59)
NetLED20_2: LED20.2 R29.1 | length 662
  Top Layer w10: LED20.2@2200,3406.5 v1(2200,3750)
  Bottom Layer w10: R29.1@2200,3431.5 v1(2200,3750)
NetLED21_2: LED21.2 R36.1 | length 662
  Top Layer w10: LED21.2@4060,3406.5 v1(4060,3750)
  Bottom Layer w10: R36.1@4060,3431.5 v1(4060,3750)
NetLED22_2: LED22.2 R37.2 | length 662
  Top Layer w10: LED22.2@3840,3406.5 v1(3840,3750)
  Bottom Layer w10: R37.2@3840,3431.5 v1(3840,3750)
NetLED23_1: LED23.1 R60.2 | length 612
  Top Layer w10: R60.2@1630,2731.5 LED23.1@1630,3343.5
NetLED23_2: LED23.2 R58.1 | length 662
  Top Layer w10: LED23.2@1630,3406.5 v1(1630,3750)
  Bottom Layer w10: R58.1@1630,3431.5 v1(1630,3750)
NetLED24_1: LED24.1 R61.2 | length 612
  Top Layer w10: R61.2@1775,2731.5 LED24.1@1775,3343.5
NetLED24_2: LED24.2 R59.2 | length 666.2
  Top Layer w10: LED24.2@1775,3406.5 1780,3411.5 v1(1780,3750)
  Bottom Layer w10: R59.2@1775,3431.5 1775,3745 v1(1780,3750)
NetR47_2: R47.2 U2.1 | length 244.9
  Top Layer w10: R47.2@3401.5,2740 3401.5,2720 3454.72,2666.77 U2.1@3604.33,2666.77
NetR48_2: R48.2 U2.3 | length 204.7
  Top Layer w10: R48.2@3401.5,2620 3500,2620 3504.41,2615.59 U2.3@3604.33,2615.59
NetR49_2: R49.2 U2.5 | length 255.9
  Top Layer w10: R49.2@3401.5,2490 3401.5,2528 3437.91,2564.41 U2.5@3604.33,2564.41
NetR50_2: R50.2 U2.9 | length 173.1
  Top Layer w10: U2.9@3835.67,2538.82 3883,2538.82 3931.82,2490 R50.2@3988.5,2490
NetR51_2: R51.2 U2.11 | length 298.3
  Top Layer w10: U2.11@3835.67,2590 3875,2590 3921,2544 3955,2544 3988.5,2577.5 R51.2@3988.5,2690
NetR63_1: R63.1 TP1.1 | length 290.9
  Top Layer w10: TP1.1@3513.32,2140 3633.32,2140 3683.32,2090 3781.82,2090 R63.1@3783.5,2090
NetR65_1: R65.1 TP2.1 | length 290.9
  Top Layer w10: TP2.1@3513.32,1940 3623.32,1940 3673.32,1990 3781.82,1990 R65.1@3783.5,1990
NetR72_2: R72.2 TP3.1 | length 541.7
  Top Layer w10: R72.2@2388.32,2051.5 2454.81,2051.5 2543.32,2140 TP3.1@2893.32,2140
NetR75_2: R75.2 TP5.1 | length 432.6
  Top Layer w10: R75.2@2621.5,1810 2624.81,1810 2624.81,1951.5 2653.32,1980 2883.32,1980 2893.32,1990 TP5.1@2890,1990
NetR79_2: R79.2 TP6.1 | length 317.4
  Top Layer w10: R79.2@2621.5,1750 2624.81,1750 2634.81,1740 2713.32,1740 2813.32,1840 TP6.1@2893.32,1840
NetR83_2: R83.2 TP7.1 | length 271.8
  Top Layer w10: R83.2@2621.5,1690 2624.81,1690 TP7.1@2893.32,1690
NetR87_2: R87.2 TP8.1 | length 309.1
  Top Layer w10: R87.2@2621.5,1630 2624.81,1630 2733.32,1630 2823.32,1540 TP8.1@2893.32,1540
NetR91_2: R91.2 TP9.1 | length 346.4
  Top Layer w10: R91.2@2621.5,1570 2624.81,1570 2673.32,1570 2853.32,1390 TP9.1@2893.32,1390
NetU2_10: U2.10 U2.13 | length 150.7
  Top Layer w10: U2.10@3835.67,2564.41 3796,2564.41 3796,2632 3805.18,2641.18 U2.13@3835.67,2641.18
SCLK: B5.8 R11.1 R12.1 R23.1 R24.1 R49.1 R100.2 | length 5911.2
  Top Layer w10: R23.1@1036.5,490 1036.5,542.5 1133,639 1133,847 v1(1090,890) R12.1@1036.5,890 ; R24.1@1996.5,490 1996.5,565 2023,591.5 2023,739 1999,739 1965,773 1965,823.5 1996.5,855 R11.1@1996.5,890 1996.5,961.5 ; v1(1996.5,1013) 1996.5,961.5 ; R100.2@2300,1178.5 2300,1114 2221,1035 2070,1035 1996.5,961.5 ; R49.1@3338.5,2490 3338.5,1679.5 ; v1(3560,1470) 3549.18,1470 3536.89,1482.28 3535.72,1482.28 3338.5,1679.5 ; B5.8@3676.61,1326.89 3623.11,1326.89 3338.5,1611.5 3338.5,1679.5
  Bottom Layer w10: v1(1090,890) 1193,993 1976.5,993 v1(1996.5,1013) 2000.35,1013 2022.35,1035 2375,1035 2402,1008 2805,1008 3235,1438 3542,1438 3548.72,1444.72 3548.72,1447.89 3560,1459.18 v1(3560,1470)
UPDI: R62.1 R67.2 | length 1722.7
  Top Layer w10: R67.2@2270,2051.5 v1(2270,2240) ; v1(3683,2190) R62.1@3783.5,2190
  Bottom Layer w10: v1(2270,2240) 3633,2240 v1(3683,2190)

## Polygon pours and split planes (outlines as drawn)
no net on Bottom Layer "NONET_L04_P000" (solid, pour order 0): 5600,4000 0,4000 0,0 5600,0
no net on Top Layer "NONET_L01_P001" (solid, pour order 1): 0,4000 5600,4000 5600,0 0,0
+5 on Plane(Power) (split plane): 5579.9,20.1 20.1,20.1 20.1,3979.9 5579.9,3979.9
GND on Plane(Gnd) (split plane): 5579.9,20.1 20.1,20.1 20.1,3979.9 5579.9,3979.9

## Silkscreen, mask and mechanical layers (free items; w line width, h text height)
Top Overlay:
  lines w10: 715,3485 1525,3485 1525,3585 715,3585 715,3485 ; 717.5,3595 2282.5,3595 2282.5,3695 717.5,3695 717.5,3595 ; 1535,3485 2285,3485 2285,3585 1535,3585 1535,3485 ; 2295,3485 3100,3485 3100,3585 2295,3585 2295,3485 ; 2295,3595 3700,3595 3700,3695 2295,3695 2295,3595 ; 3110,3485 3700,3485 3700,3585 3110,3585 3110,3485 ; 3715,3485 4425,3485 4425,3585 3715,3585 3715,3485 ; 3715,3595 4425,3595 4425,3695 3715,3695 3715,3595
  text "ABS Data Systems, Inc, (c) Copyright 2023" at 1410,3829.99 h60
  text "CPU Bus and Control" at 1170,3630 h40
  text "ADC Control" at 2790,3630 h40
  text "Power" at 3980,3620 h40
  text "Int" at 1595,3511.5 h40
  text "3.3V" at 3785,3511.5 h40
  text "5V" at 4045.78,3511.5 h40
  text "6V" at 4293.24,3511.5 h40
  text "D7" at 735,3510 h40
  text "D6" at 835,3510 h40
  text "D5" at 935,3510 h40
  text "D4" at 1035,3510 h40
  text "D3" at 1135,3510 h40
  text "D2" at 1235,3510 h40
  text "D1" at 1335,3510 h40
  text "D0" at 1435,3510 h40
  text "Rst" at 1735,3510 h40
  text "CS" at 1895,3510 h40
  text "RD" at 2050,3510 h40
  text "WR" at 2175,3510 h40
  text "CS5" at 2340,3510 h40
  text "CS4" at 2490,3510 h40
  text "CS3" at 2645,3510 h40
  text "CS2" at 2800,3510 h40
  text "CS1" at 2960,3510 h40
  text "SCLK" at 3150,3510 h40
  text "DOut" at 3370,3510 h40
  text "DIn" at 3550,3510 h40
  text "P/N ADC-32958" at 4310,60 h60
Mechanical 1:
  the board outline again, w10

## Text inside footprints (layer, text, board x,y; h text height)
H1: Top Overlay "1" at 3995,2280 h50 r270; Top Overlay "2" at 4090,2295 h50 r270; Top Overlay "5" at 3995,1920 h40 r270; Top Overlay "6" at 4095,1920 h40 r270
H3: Top Overlay "2" at 4640,1290 h40; Top Overlay "1" at 4640,1190 h40; Top Overlay "22" at 5510,1190 h35; Top Overlay "23" at 5510,1295 h35; Top Overlay "3" at 4640,1390 h40; Top Overlay "24" at 5510,1395 h35